# Altium PCB sensor.PcbDoc
Units mil, origin at the board's own origin, x right, y up, seen from the top; angles counter-clockwise.
Board outline 2520.67 x 1119.09 mil, 2 copper layers (Top Layer, Bottom Layer); 51 components, 36 nets, 153 pads, 24 vias.
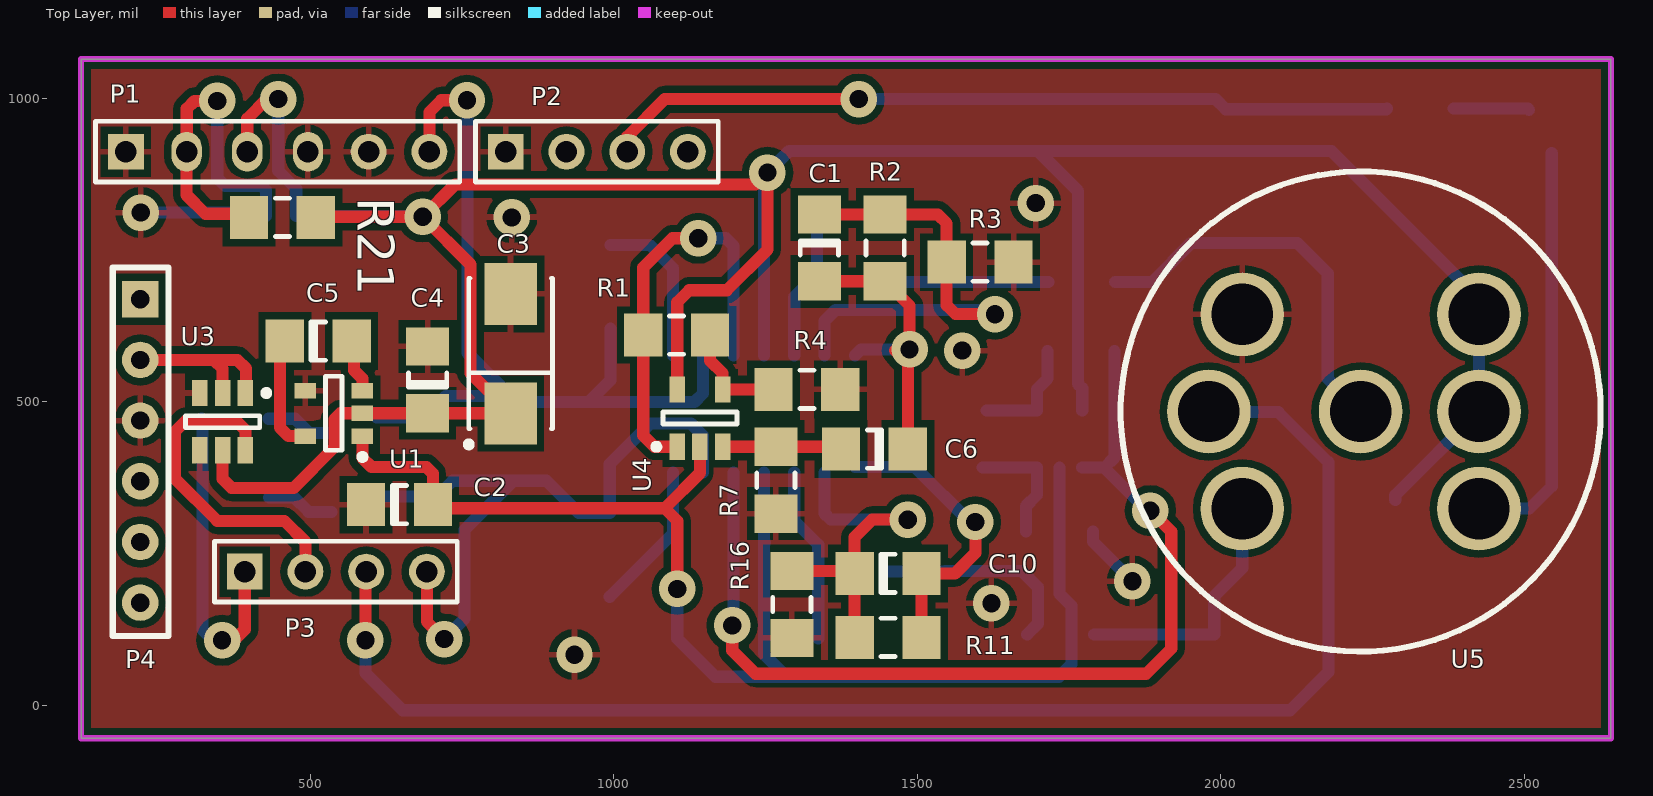
[diagram p0: Top Layer view]
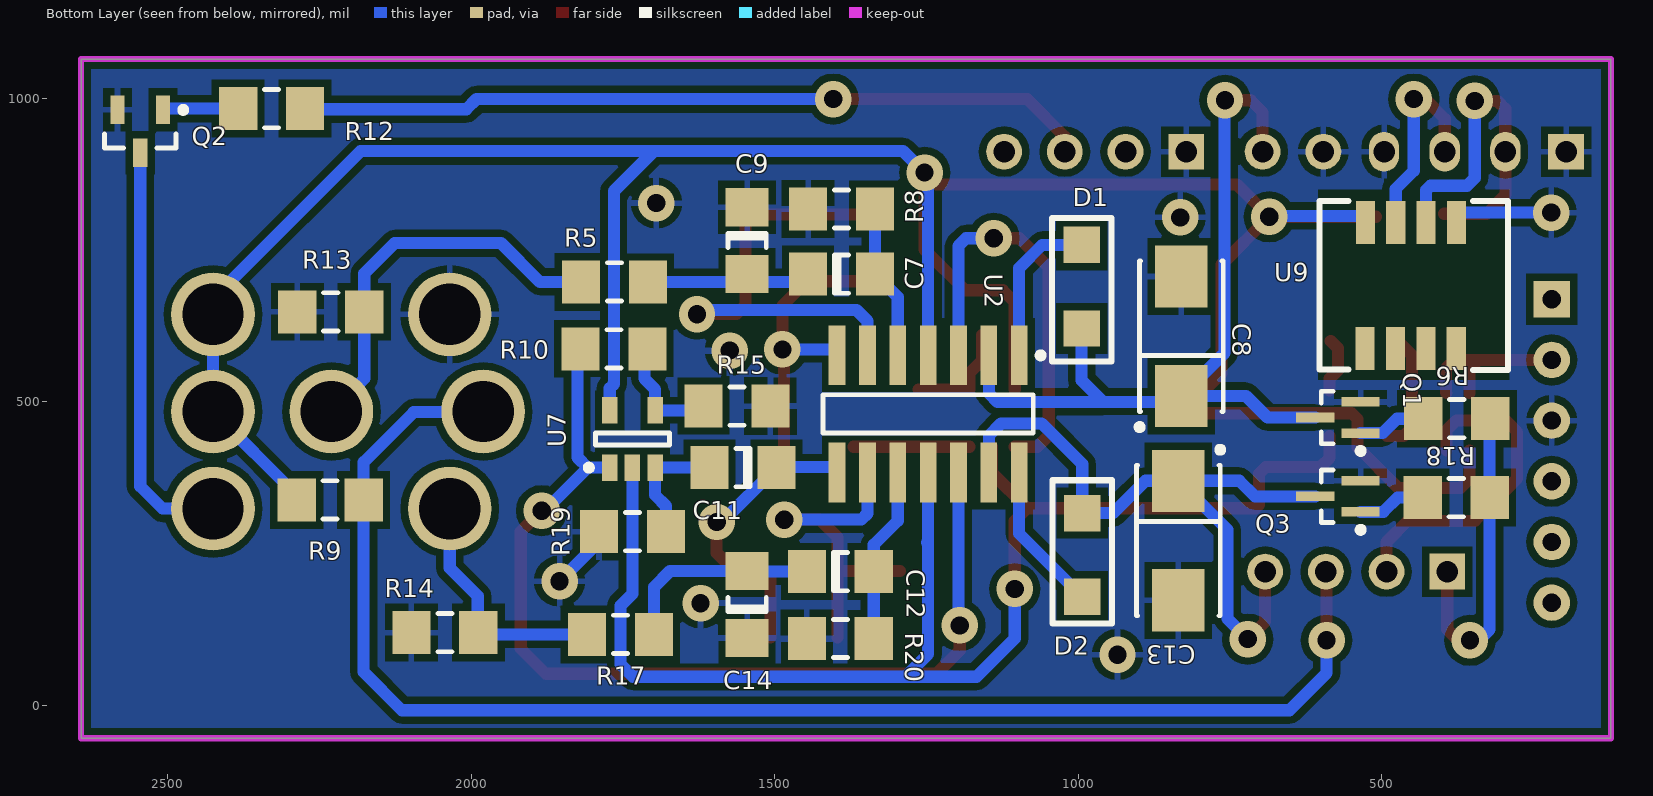
[diagram p1: Bottom Layer view, seen from below]

## Layer stack, top to bottom
Top Layer: signal copper 1.4
Dielectric: dielectric 12.6, FR-4, Dk 4.8
Bottom Layer: signal copper 1.4

## Board outline
122.05,1064.96 122.05,-54.13 2642.72,-54.13 2642.72,1064.96

## Design rules (kind name [scope] priority, off if disabled: settings)
Clearance [All] p1: gap=11.81
ComponentClearance [All] p1: gap=10 collisioncheckmode=3 verticalgap=10 showdistances=TRUE
FabricationTestpoint [(IsPad And (OnTopLayer Or OnBottomLayer)) Or (IsVia)] p1: side=3 testpointundercomponent=TRUE minsize=40 maxsize=100 preferedsize=60 minholesize=0 maxholesize=40 preferedholesize=32 testpointgrid=1 allowsidetop=TRUE allowsidebottom=TRUE usegrid=TRUE gridtolerance=0.01 minspacing=10 compbodyclearance=10 boardedgeclearance=10
PolygonConnect [All] p1: connectstyle=Relief reliefconductorwidth=10 reliefentries=4 polygonreliefangle="90 Angle"
RoutingVias [All] p1: holewidth=30 width=60 viastyle="Through Hole" minholewidth=28 minwidth=60 maxholewidth=35 maxwidth=60
SilkscreenOverComponentPads [All] p1: minsilkscreentomaskgap=10
SolderMaskExpansion [All] p1: expansion=8
Width [All] p1: maxlimit=20 minlimit=12 preferedwidth=20 minimp=50.000000 maximp=50.000000 favimp=50.000000 checkconnectedcopper=TRUE
25 further rules are at their usual default settings.

## Components (designator, comment, footprint, x,y, rotation, side; value= is the part's Value field where it differs from the comment)
C1 "Cap" C1206 1338.58,753.94 r270 top
C2 "Cap" C1206 646.65,330.71 r0 top
C3 "T491C" C 829.72,579.72 r90 top
C4 "Cap" C1206 692.91,536.42 r90 top
C5 "Cap" C1206 512.8,600.39 r0 top
C6 "Cap" C1206 1429.13,422.24 r180 top
C7 "Cap" C1206 1389.76,710.63 r180 bottom
C8 "T491C" C 829.72,608.27 r90 bottom
C9 "Cap" C1206 1545.28,765.75 r270 bottom
C10 "Cap" C1206 1451.77,217.52 r0 top
C11 "Cap" C1206 1552.17,391.73 r0 bottom
C12 "Cap" C1206 1391.73,220.47 r180 bottom
C13 "T491C" C 834.65,271.65 r270 bottom
C14 "Cap" C1206 1545.28,166.34 r90 bottom
D1 "Diode 1N4148" "LED SMD 1206" 994.09,758.86 r270 bottom
D2 "Diode 1N4148" "LED SMD 1206" 993.11,179.13 r90 bottom
P1 "Header 6" HDR1X6 195.87,912.4 r0 top
P2 "Header 4" HDR1X4 821.85,912.4 r0 top
P3 "Header 4" HDR1X4 391.73,220.47 r0 top locked
P4 "PicKit2" PICKIT3 219.49,669.29 r270 top locked
Q1 "NXP SOT323" SOT323-3BM 571.85,474.41 r0 bottom
Q2 "2N7000" SOT23-3L 2545.28,945.87 r270 bottom
Q3 "NXP SOT323" SOT323-3BM 571.85,344.49 r0 bottom
R1 "Res Semi" 3216[1206] 1103.35,610.24 r0 top
R2 "Res Semi" 3216[1206] 1446.85,753.94 r270 top
R3 "Res Semi" 3216[1206] 1603.35,730.32 r180 top
R4 "Res Semi" 3216[1206] 1317.91,520.67 r0 top
R5 "Res Semi" 3216[1206] 1763.78,697.83 r0 bottom
R6 "Res Semi" 3216[1206] 375.98,472.44 r180 bottom
R7 "Res Semi" 3216[1206] 1266.73,371.06 r90 top
R8 "Res Semi" 3216[1206] 1389.76,817.91 r180 bottom
R9 "Res Semi" 3216[1206] 2232.28,338.58 r0 bottom
R10 "Res Semi" 3216[1206] 1764.76,587.6 r180 bottom
R11 "Res Semi" 3216[1206] 1451.77,112.2 r0 top
R12 "Res Semi" 3216[1206] 2328.74,983.27 r0 bottom
R13 "Res Semi" 3216[1206] 2231.3,648.62 r0 bottom
R14 "Res Semi" 3216[1206] 2043.31,120.08 r0 bottom
R15 "Res Semi" 3216[1206] 1562.01,493.11 r180 bottom
R16 "Res Semi" 3216[1206] 1293.31,166.34 r90 top
R17 "Res Semi" 3216[1206] 1753.94,117.13 r0 bottom
R18 "Res Semi" 3216[1206] 376.97,342.52 r180 bottom
R19 "Res Semi" 3216[1206] 1734.25,286.42 r180 bottom
R20 "Res Semi" 3216[1206] 1391.73,110.24 r180 bottom
R21 "Res Semi" 3216[1206] 453.74,804.13 r0 top
U1 "TPS60403" SOT23-5AL 538.39,481.3 r180 top
U2 "LM324M" M14A_M 1247.05,480.31 r270 bottom
U3 "ADG 601" SOT26A-6N 355.32,467.52 r270 top
U4 "MAX4250EUK-T" SOT23-5AN 1141.73,473.42 r90 top
U5 "IrcA1" IrcA1 2230.31,484.25 r90 top
U7 "MAX4250EUK-T" SOT23-5AN 1734.25,438.98 r90 bottom
U9 "SHT11" SHT11 451.77,691.93 r270 bottom

## Footprints (in the part's own frame and the unit in brackets; to place one, negate y for a bottom-side part, rotate by r counter-clockwise, add the part's x,y. Pads: shape width x height; smd on the part's side, far side on the other; paste and mask are expansions set on the pad)
3216[1206] [mm] "Chip Resistor; Body 3.2 x 1.6 mm (LxW typ)"
  rect 1.6x1.8 smd: 1(-1.4,0) 2(1.4,0)
  silkscreen extent -0.3,-0.8 0.3,0.8
C [mm] "Capacitor, SM Tantalum; Body 6.0 x 3.2 mm (LxW typ)"
  rect 2.6x2.2 smd: 1(-2.5,0) 2(2.5,0)
  silkscreen extent -3.92,-1.75 3.15,1.87
C1206 [mm] "Chip Capacitor; Body 3.2 x 1.6 mm (LxW typ)"
  rect 1.6x1.8 smd: 1(-1.4,0) 2(1.4,0)
  silkscreen extent -0.3,-0.8 0.3,0.8
HDR1X4 [mm] "Connector; Header; 4 Position"
  rect 1.5x1.5 hole 0.9: 1(0,0)
  round 1.5 hole 0.9: 2(2.54,0) 3(5.08,0) 4(7.62,0)
  silkscreen extent -1.27,-1.27 8.89,1.27
HDR1X6 [mm] "Connector; Header; 6 Position"
  rect 1.5x1.5 hole 0.9: 1(0,0)
  oval 1.27x1.651 hole 0.9: 2(2.54,0) 3(5.08,0) 4(7.62,0)
  round 1.5 hole 0.9: 5(10.16,0) 6(12.7,0)
  silkscreen extent -1.27,-1.27 13.97,1.27
IrcA1 [mm]
  round 3.5 hole 2.57: 1(-4.064,-4.953) 2(0,-4.953) 3(4.064,-4.953) 4(0,0) 5(-4.064,4.953) 6(0,6.35) 7(4.064,4.953)
  silkscreen extent -10.04,-10.05 10.04,10.04
"LED SMD 1206" [mil]
  rect 60x60 smd: 1(0,0) 2(137.8,0)
  silkscreen extent -44,-49 192,49
M14A_M [mm] "SOIC, 14-Leads, Body 8.6x3.9mm, Pitch 1.27mm, IPC Low Density"
  rect 2.5x0.7 smd: 1(-2.45,3.81) 2(-2.45,2.54) 3(-2.45,1.27) 4(-2.45,0) 5(-2.45,-1.27) 6(-2.45,-2.54) 7(-2.45,-3.81) 8(2.45,-3.81) 9(2.45,-2.54) 10(2.45,-1.27) 11(2.45,0) 12(2.45,1.27) 13(2.45,2.54) 14(2.45,3.81)
  silkscreen extent -2.57,-4.4 0.8,4.83, body extent -2,-4.38 2,4.38, height 1.75
PICKIT3 [mil]
  rect 60x60 hole 30: 1(0,0)
  round 60 hole 30: 2(100,0) 3(200,0) 4(300,0) 5(400,0) 6(500,0)
  silkscreen extent -52,-45 555,46
SHT11 [mm] "SOIC, 14-Leads, Body 8.6x3.9mm, Pitch 1.27mm, IPC Low Density"
  rect 1.8x0.8 smd: 1(-2.638,1.91) 2(-2.638,0.64) 3(-2.638,-0.63) 4(-2.638,-1.9) 5(2.638,-1.91) 6(2.638,-0.64) 7(2.638,0.63) 8(2.638,1.9)
  silkscreen extent -3.54,-3.83 3.54,4.08
SOT23-3L [mm] "SOT23, 3-Leads, Body 2.9x1.3mm, Pitch 0.95mm, Lead Span 2.5mm, IPC High Density"
  rect 1.2x0.6 smd: 1(-0.9,0.95) 2(-0.9,-0.95) 3(0.9,0)
  silkscreen extent -1.02,-1.5 0.7,1.92, body extent -0.7,-1.5 0.7,1.5, height 1.1
SOT23-5AL [mm] "SOT23, 5-Leads, Body 2.9x1.6mm, Pitch 0.95mm, Lead Span 2.8mm, IPC High Density"
  rect 0.9x0.65 smd: 1(-1.2,0.95) 2(-1.2,0) 3(-1.2,-0.95) 4(1.2,-0.95) 5(1.2,0.95)
  silkscreen extent -1.33,-1.55 0.35,1.95, body extent -0.9,-1.55 0.9,1.55, height 1.45
SOT23-5AN [mm] "SOT23, 5-Leads, Body 2.9x1.6mm, Pitch 0.95mm, Lead Span 2.8mm, IPC Medium Density"
  rect 1.1x0.65 smd: 1(-1.2,0.95) 2(-1.2,0) 3(-1.2,-0.95) 4(1.2,-0.95) 5(1.2,0.95)
  silkscreen extent -1.32,-1.55 0.25,1.95, body extent -0.9,-1.55 0.9,1.55, height 1.45
SOT26A-6N [mm] "SOT23, 6-Leads, Body 2.9x1.7mm, Pitch 0.95mm, Lead Span 2.8mm, IPC Medium Density"
  rect 1.1x0.65 smd: 1(-1.2,0.95) 2(-1.2,0) 3(-1.2,-0.95) 4(1.2,-0.95) 5(1.2,0) 6(1.2,0.95)
  silkscreen extent -1.32,-1.55 0.25,1.95, body extent -0.9,-1.55 0.9,1.55, height 1.45
SOT323-3BM [mm] "SOT23, 3-Leads, Body 2x1.25mm, Pitch 0.65mm, Lead Span 2.1mm, IPC Low Density"
  rect 1.6x0.4 smd: 1(-0.95,0.65) 2(-0.95,-0.65) 3(0.95,0)
  silkscreen extent -1.07,-1.1 0.7,1.52, body extent -0.7,-1.1 0.7,1.1, height 1.1

## Part data
C1 C2 C4 C5 C6 C7 C9 C10 C11 C12 C14: "Capacitor"
C3 C8 C13: "Solid Tantalum Chip Capacitor, Standard T491 Series - Industrial Grade"
D1 D2: "High Conductance Fast Diode"
P1: "Header, 6-Pin"
P2 P3: "Header, 4-Pin"
Q1 Q3: library part 2N2222A, "High Speed Switches"
Q2: "N-Channel Enhancement Mode Vertical DMOS FET"
R1 R2 R3 R4 R5 R6 R7 R8 R9 R10 R11 R12 R13 R14 R15 R16 R17 R18 R19 R20 R21: "Semiconductor Resistor"
U2: "Low Power Quad Operational Amplifier"
U4 U7: "SOT23, Single-Supply, Low-Noise, Low-Distortion, Rail-to-Rail Op Amp"

## Via types
v1: diameter 60, hole 30, Top Layer to Bottom Layer, 24 vias

## Nets (pads, with @x,y where several pads share a name; then routed paths per layer and width w, separated by ;. In a path a pad name is that pad's centre, name@x,y a point inside that pad or via, vN(x,y) a via of type N, cw(c..) or ccw(c..) an arc to the next point about the centre after c; other vN are vias at no path point)
-VCC: C2.2 U1.1 U2.11 U4.2 U7.2 | length 2560.5
  Top Layer w20: U1.1 585.63,407.48 600.39,392.72 690.94,392.72 701.77,381.89 C2.2 707.68,324.8 841.54,324.8 ; v1(1104.33,191.93) 1104.33,304.13 1083.66,324.8 ; U4.2 1141.73,382.87 1083.66,324.8 ; 841.54,324.8 1083.66,324.8 ; 841.54,324.8 1083.66,324.8
  Bottom Layer w20: v1(1104.33,191.93) 1104.33,110.24 1167.32,47.24 1284.45,47.24 ; U2.11 1247.05,270.67 ; 1249.02,268.7 1247.05,270.67 ; U7.2 1734.25,184.06 1753.94,164.37 1753.94,67.91 1733.27,47.24 1284.45,47.24 ; 1247.05,270.67 1247.05,84.65 1284.45,47.24
GND: C2.1 C3.2 C4.2 C8.2 C9.1 C13.2 C14.1 P1.1 P1.4 P1.5 P2.1 P4.3 Q1.2 Q2.2 Q3.2 R3.1 R4.2 R7.1 R8.1 R13.2 R14.2 R15.2 R16.1 R19.1 R20.1 U1.4 U3.3 U3.4 U5.7 U9.1 | length 266.9
  Bottom Layer w20: v1(220.47,812.01) 371.16,812.01 U9.1@376.57,806.59 ; R19.1 1789.37,269.69 v1(1854.33,204.72)
  other v1: 935.04,83.66 1622.05,168.31 1573.82,584.65 831.69,804.13 1694.88,827.76
NetC1_1: C1.1 R2.1 R3.2 U2.6 | length 784.4
  Top Layer w20: C1.1 R2.1 1533.46,809.06 1548.23,794.29 R3.2 1548.23,659.45 1562.99,644.68 v1(1627.95,644.68)
  Bottom Layer w20: U2.6 1347.05,633.46 1365.16,651.57 1621.06,651.57 v1(1627.95,644.68)
NetC1_2: C1.2 C6.1 R2.2 U2.7 | length 514.1
  Top Layer w20: C1.2 R2.2 1487.2,658.46 1487.2,608.27 1463.58,584.65 1484.25,563.98 C6.1
  Bottom Layer w20: U2.7 1406.89,586.61 v1(1487.2,586.61)
NetC5_1: C5.1 U1.5 | length 199.5
  Top Layer w20: C5.1@473.43,600.39 449.8,576.77 449.8,457.68 463.58,443.9 U1.5
NetC5_2: C5.2 U1.3 | length 92.3
  Top Layer w20: C5.2@583.66,600.39 571.85,588.58 571.85,552.17 585.63,538.39 U1.3
NetC6_2: C6.2 R7.2 U4.3 | length 190.9
  Top Layer w20: U4.3 R7.2 C6.2@1370.08,426.18
NetC7_1: C7.1 C9.2 R5.1 | length 270.7
  Bottom Layer w20: C7.1@1444.88,697.83 1545.28,697.83 1698.82,697.83 R5.1@1715.55,697.83
NetC7_2: C7.2 R8.2 U2.5 | length 243.9
  Bottom Layer w20: U2.5 1297.05,673.03 C7.2 R8.2@1334.65,805.12
NetC8_1: C8.1 D1.2 P1.6 Q1.3 U2.2 | length 1432.3
  Top Layer w20: P1.6 695.87,977.36 715.55,997.05 v1(757.87,997.05)
  Bottom Layer w20: Q1.3 687.99,474.41 723.43,509.84 C8.1 ; v1(757.87,997.05) 758.86,996.06 758.86,580.71 C8.1 ; D1.2 994.09,535.43 958.66,500 ; U2.2 1147.05,514.17 1132.87,500 958.66,500 ; C8.1 819.98,500.09 820.07,500 958.66,500
NetC10_1: C10.1 R11.1 R16.2 U2.9 | length 578.7
  Top Layer w20: R16.2 1392.72,221.46 C10.1 ; R11.1 C10.1 ; v1(1484.25,306.1) 1425.2,306.1 1396.65,277.56 C10.1
  Bottom Layer w20: U2.9 1347.05,316.34 1357.28,306.1 v1(1484.25,306.1)
NetC10_2: C10.2 C11.1 R11.2 U2.8 | length 502.3
  Top Layer w20: R11.2 C10.2 1562.01,217.52 1595.47,250.98 v1(1595.47,302.17)
  Bottom Layer w20: U2.8@1397.05,392.72 C11.1@1504.92,392.72 ; C11.1 1586.61,302.17 v1(1595.47,302.17)
NetC11_2: C11.2 R19.2 U7.3 | length 202.2
  Bottom Layer w20: C11.2 U7.3 1696.85,346.46 1679.13,328.74 R19.2
NetC12_1: C12.1 C14.2 R17.1 | length 348.5
  Bottom Layer w20: C12.1 1544.29,220.47 C14.2 1672.24,221.46 1698.82,194.88 1698.82,134.84 R17.1@1681.1,117.13
NetC12_2: C12.2 R20.2 U2.10 | length 290
  Bottom Layer w20: U2.10 1297.05,304.33 1336.61,264.76 C12.2 R20.2
NetC13_1: C13.1 D2.2 P3.4 Q3.3 U2.13 | length 1179.1
  Top Layer w20: P3.4 691.73,137.99 v1(720.47,109.25)
  Bottom Layer w20: Q3.3 708.66,344.49 734.35,370.17 834.55,370.17 C13.1 ; v1(720.47,109.25) 753.94,142.72 753.94,289.37 C13.1 ; U2.13 1147.05,444.49 1126.97,464.57 1060.04,464.57 993.11,397.64 D2.2 941.93,316.93 888.78,370.08 C13.1
NetD1_1: D1.1 U2.1 | length 262.8
  Bottom Layer w20: D1.1 1059.06,758.86 1097.05,720.87 U2.1
NetD2_1: D2.1 U2.14 | length 247.8
  Bottom Layer w20: D2.1 1097.05,283.07 U2.14
NetP1_2: P1.2 R21.1 U9.2 | length 570.8
  Top Layer w12: R21.1@396.65,810.04 R21.1@397.64,809.06
  Top Layer w20: v1(346.46,996.06) 309.06,996.06 296.26,983.27 296.26,912.8 P1.2 295.87,840.94 326.77,810.04 R21.1@396.65,810.04
  Bottom Layer w20: v1(346.46,996.06) 346.46,869.09 359.25,856.3 419.29,856.3 426.57,849.02 U9.2@426.57,806.59
NetP1_3: P1.3 U9.3 | length 323.4
  Top Layer w20: P1.3 395.87,966.73 428.15,999.02 v1(446.85,999.02)
  Bottom Layer w20: v1(446.85,999.02) 446.85,880.91 476.57,851.18 U9.3@476.57,806.59
NetP2_3: P2.3 R12.1 | length 1309.5
  Top Layer w20: P2.3 1021.85,937.2 1083.66,999.02 v1(1403.54,999.02)
  Bottom Layer w20: v1(1403.54,999.02) 1991.14,999.02 2007.87,982.28 2272.64,982.28 R12.1
NetP3_1: P3.1 R6.2 R18.2 | length 527.9
  Top Layer w20: v1(354.33,107.28) 374.02,107.28 391.73,125 P3.1
  Bottom Layer w20: R6.2 321.85,471.46 R18.2 321.85,125 339.57,107.28 v1(354.33,107.28)
NetP3_2: P3.2 U3.6 | length 547.9
  Top Layer w20: U3.6 392.72,453.74 376.97,469.49 295.28,469.49 276.57,450.79 276.57,374.02 346.46,304.13 456.69,304.13 491.73,269.09 P3.2
NetP3_3: P3.3 R9.1 U5.6 | length 2382.8
  Top Layer w20: v1(590.55,107.28) 590.55,219.29 P3.3
  Bottom Layer w20: v1(590.55,107.28) 590.55,53.15 651.57,-7.87 2114.17,-7.87 2177.17,55.12 R9.1 2177.17,400.59 2094.49,483.27 1981.3,483.27 U5.6
NetQ1_1: Q1.1 R6.1 | length 113.1
  Bottom Layer w20: R6.1 474.41,472.44 498.03,448.82 Q1.1
NetQ2_2: Q2.1 R12.2 | length 124.8
  Bottom Layer w20: R12.2 2505.91,983.27 Q2.1
NetQ2_3: Q2.3 U5.1 | length 684.5
  Bottom Layer w20: U5.1 2508.31,324.25 2545.28,361.22 2545.28,832.68 Q2.3
NetQ3_1: Q3.1 R18.1 | length 112.1
  Bottom Layer w20: R18.1 473.43,342.52 497.05,318.9 Q3.1
NetR1_1: R1.1 U2.3 U4.1 | length 694.8
  Top Layer w20: U4.1 1066.93,426.18 1048.23,444.88 R1.1 1048.23,721.46 1096.46,769.68 v1(1138.78,769.68)
  Bottom Layer w20: v1(1138.78,769.68) 1184.58,769.68 1197.05,757.21 U2.3
NetR1_2: R1.2 R4.1 U4.4 | length 181.8
  Top Layer w20: R1.2 1158.46,567.91 1179.13,547.24 U4.4 R4.1
NetR5_2: R5.2 R13.1 U5.4 | length 647.5
  Bottom Layer w20: R5.2@1825.79,697.83 1886.81,697.83 1950.79,761.81 2125.98,761.81 2176.18,711.61 R13.1 2176.18,538.39 U5.4
NetR10_1: R10.1 U2.12 U7.1 | length 1631.8
  Top Layer w20: v1(1194.88,131.89) 1194.88,90.55 1233.27,52.17 1876.97,52.17 1918.31,93.5 1918.31,286.42 v1(1883.86,320.87)
  Bottom Layer w20: v1@1197.05,131.89 U2.12 ; U7.1 1808.07,391.73 ; R10.1@1824.8,583.66 1824.8,408.46 1808.07,391.73 ; v1(1883.86,320.87) 1878.94,320.87 1808.07,391.73
NetR10_2: R10.2 R15.1 U7.4 | length 187.5
  Bottom Layer w20: R15.1@1614.17,486.22 U7.4 1696.85,520.67 1714.57,538.39 R10.2@1714.57,583.66
NetR14_1: R14.1 R17.2 U5.5 | length 424.1
  Bottom Layer w20: R17.2@1791.34,117.13 1989.17,117.13 1989.17,180.12 2035.31,226.26 U5.5
VCC: C3.1 C4.1 R9.2 R21.2 U1.2 U2.4 U3.5 U4.5 U5.2 U5.3 U7.5 U9.4 | length 4815.5
  Top Layer w20: U3.5 355.32,373.03 370.08,358.27 472.44,358.27 539.37,425.2 539.37,471.46 549.21,481.3 U1.2 C4.1 C3.1 763.78,547.24 763.78,726.38 v1(685.04,805.12) ; R21.2@508.86,805.12 v1(685.04,805.12) ; U4.5 1104.33,664.37 1124.02,684.06 1186.02,684.06 1252.95,750.98 v1(1252.95,877.95) 1233.27,858.27 738.19,858.27 v1(685.04,805.12)
  Bottom Layer w20: U9.4@526.57,806.59 683.56,806.59 v1(685.04,805.12) ; U2.4 1247.05,872.05 v1(1252.95,877.95) 1288.39,913.39 1698.82,913.39 ; U7.5 1771.65,522.64 1764.76,529.53 1764.76,847.44 1698.82,913.39 ; R9.2 2287.4,346.34 U5.2 U5.3 2425.31,670.16 2182.09,913.39 1698.82,913.39
VCC-IN: P4.2 U3.1 U3.2 | length 284.4
  Top Layer w20: P4.2@219.49,572.43 P4.2 341.14,569.29 ; U3.2 355.32,555.12 341.14,569.29 ; U3.1 393.7,515.75 393.7,555.12 379.53,569.29 341.14,569.29
pads on no net: P2.2 P2.4 P4.1 P4.4 P4.5 P4.6 U9.5 U9.6 U9.7 U9.8

## Polygon pours and split planes (outlines as drawn)
GND on Top Layer "GND_PLANE" (solid, remove dead copper, pour order 7): 122.05,1064.96 122.05,-54.13 2642.72,-54.13 2642.72,1064.96
GND on Bottom Layer "GND_PLANE" (solid, remove dead copper, pour order 7): 122.05,1067.91 122.05,-51.18 2642.72,-51.18 2642.72,1067.91

## Keep-outs
Keep-Out Layer:
  the board outline again, w10

## Other copper
Bottom Layer:
  pour cut-out: 289.37,849.41 604.33,849.41 604.33,536.42 289.37,536.42

## Dimensions
122.05,-54.13 to 2642.72,-54.13 on Keep-Out Layer
122.05,1064.96 to 122.05,-54.13 on Keep-Out Layer